# EAGLE board TSOC_GROVEY_FOUR (EAGLE 6.6.0)
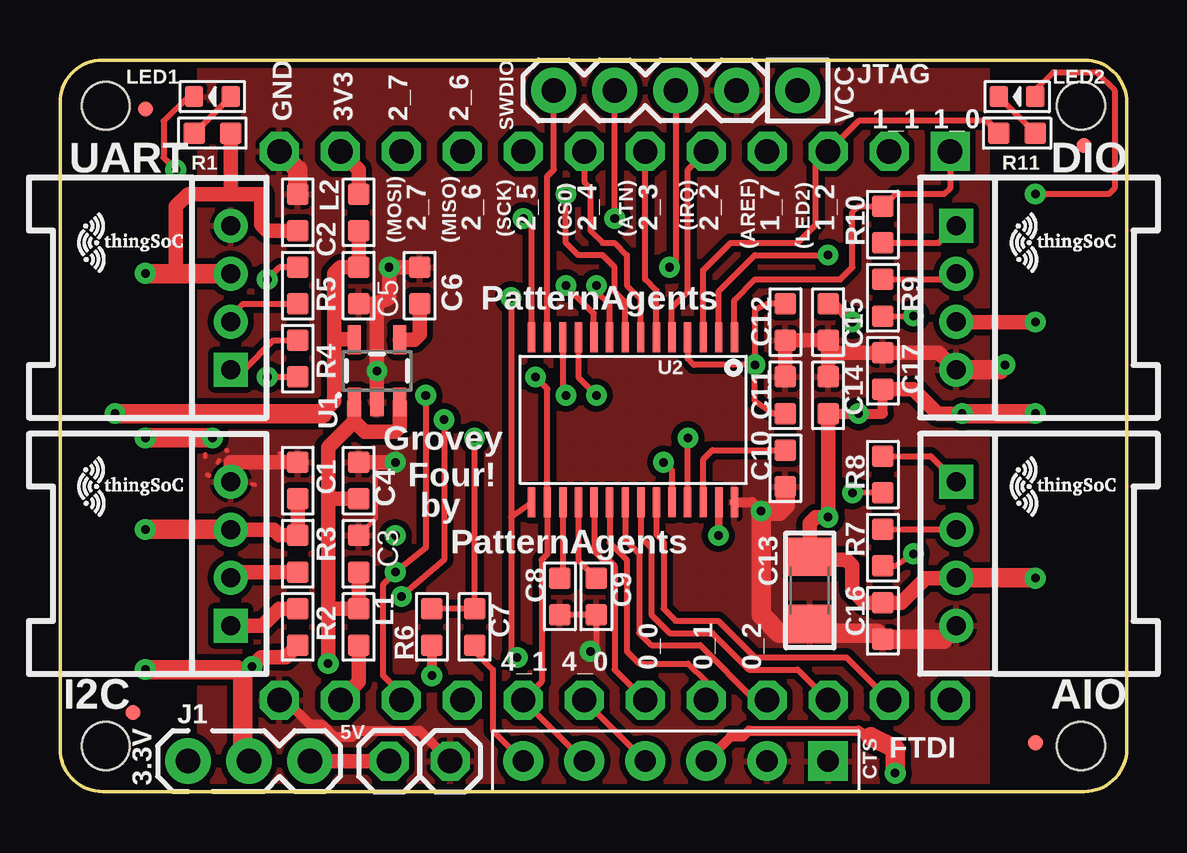
[diagram p0: board, top side]
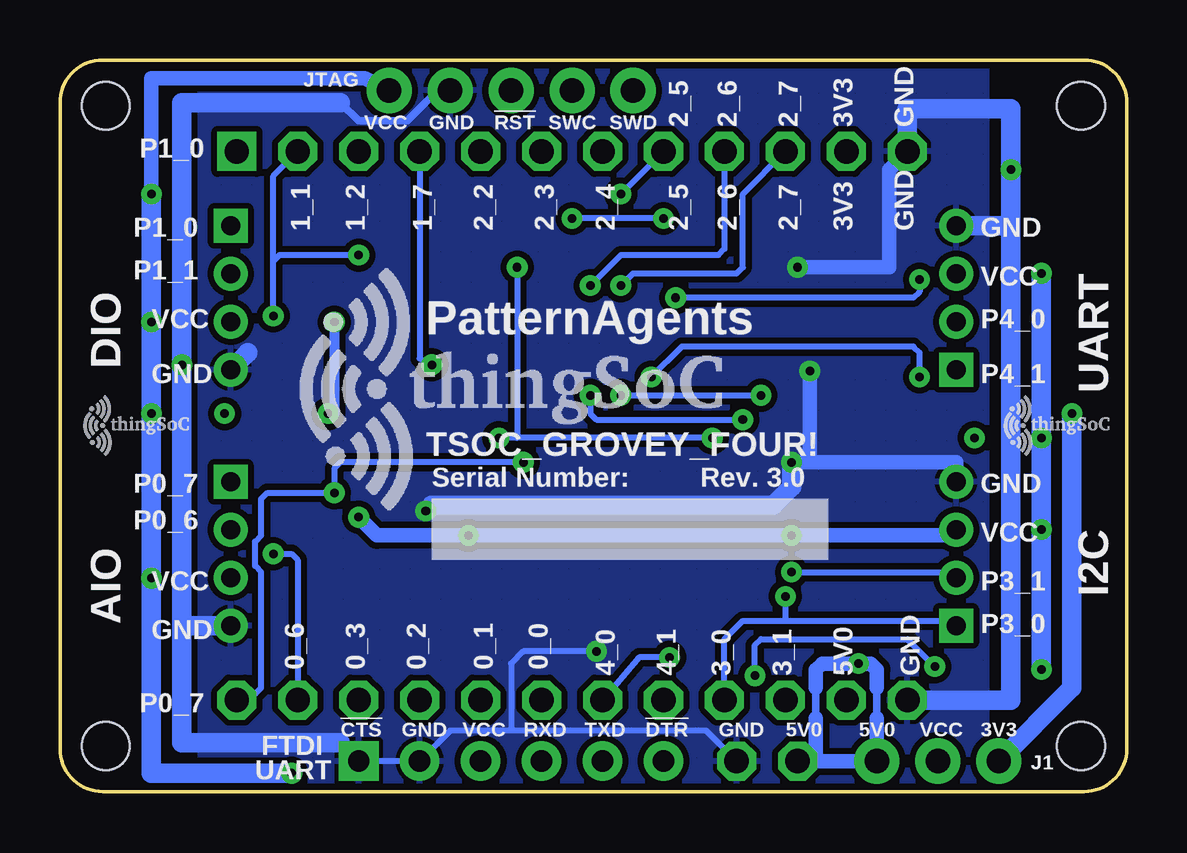
[diagram p1: board, bottom side, seen from below]

Size 44.45 x 30.48 mm. Coordinates in mm from the lower left corner, seen from the top.
Copper layers (1*16): Top 0.035mm / dielectric 1.5mm / Bottom 0.035mm
Design rules "PatternAgents_7mil": minimum track width 7mil, minimum drill 14mil, track to track 7mil, track to pad 7mil, pad to pad 7mil, via to via 7mil, smd to smd 7mil, copper to edge 7mil, drill to drill 7mil, minimum pad ring 12mil, minimum via ring 10mil, stop-mask expansion 4mil, vias tented up to drill 25mil, thermal gap 7mil

## Footprints (pad centres in the part's own frame; a part is rotated, then mirrored left to right if it is on the bottom)
1X01 = drill 1.016 octagon: 1 0,0
TSOC-BB-BRD-DIM = hole 2: 13.335,16.891; -13.335,16.891; 13.335,-23.749; -13.335,-23.749
HW4-2.0-90D = drill 0.8 pad 1.27 square: 1 -3,0 | drill 0.8 pad 1.27: 2 -1,0; 3 1,0; 4 3,0
C0603 = smd 0.889 x 0.889: 1 0,0.762; 2 0,-0.762
EIA-1206 = smd 1.6 x 1.8: 1 -1.4,0; 2 1.4,0
MICRO-FIDUCIAL = smd 0.635 x 0.635: 1 0,0
H6-2.54 = drill 0.889 pad 1.651 square: 1 0,6.35 | drill 0.889 pad 1.651: 2 0,3.81; 3 0,1.27; 4 0,-1.27; 5 0,-3.81; 6 0,-6.35
JMP-3-NO-PTH-2.54 = drill 1.016 pad 1.88: 1 0,0; 2 2.54,0; 3 5.08,0
PSOC_JTAG_MINSILK = drill 1.016 pad 1.88: 1 -5.08,0; 2 -2.54,0; 3 0,0; 4 2.54,0; 5 5.08,0
L0603 = smd 0.889 x 0.889: 1 -0.762,0; 2 0.762,0
LED-0603 = smd 0.762 x 0.889: + -0.762,0; - 0.762,0
R0603 = smd 0.889 x 0.889: 1 0,0.762; 2 0,-0.762
TSOC-BB-S24 = drill 1.016 square: 1B -11.43,11.43 | drill 1.016 octagon: 1C 11.43,11.43; 2B -11.43,8.89; 2C 11.43,8.89; 3B -11.43,6.35; 3C 11.43,6.35; 4B -11.43,3.81; 4C 11.43,3.81; 5B -11.43,1.27; 5C 11.43,1.27; 6B -11.43,-1.27; 6C 11.43,-1.27; 7B -11.43,-3.81; 7C 11.43,-3.81; 8B -11.43,-6.35; 8C 11.43,-6.35; 9B -11.43,-8.89; 9C 11.43,-8.89; 10B -11.43,-11.43; 10C 11.43,-11.43; 11B -11.43,-13.97; 11C 11.43,-13.97; 12B -11.43,-16.51; 12C 11.43,-16.51
SOT23-5 = smd 0.55 x 1.2: 1 -0.95,-1.3; 2 0,-1.3; 3 0.95,-1.3; 4 0.95,1.3; 5 -0.95,1.3
SSOP28 = smd 0.305 x 1.245: 1 4.224,3.441; 2 3.574,3.441; 3 2.924,3.441; 4 2.274,3.441; 5 1.624,3.441; 6 0.974,3.441; 7 0.325,3.44; 8 -0.326,3.441; 9 -0.976,3.441; 10 -1.626,3.441; 11 -2.276,3.441; 12 -2.926,3.441; 13 -3.576,3.441; 14 -4.226,3.441; 15 -4.224,-3.441; 16 -3.574,-3.441; 17 -2.924,-3.441; 18 -2.274,-3.441; 19 -1.624,-3.441; 20 -0.974,-3.441; 21 -0.324,-3.441; 22 0.326,-3.441; 23 0.976,-3.441; 24 1.626,-3.441; 25 2.276,-3.441; 26 2.926,-3.441; 27 3.576,-3.441; 28 4.226,-3.441

## Placement (x,y rotation side)
5V0  [1X01]  13.72,1.27 0 top
$$U$1  TSOC-PCB-SINGLE  [TSOC-BB-BRD-DIM]  25.65,15.24 270 top
$$U$2  TSOC-LOGO-SMALL  [TSOC-LOGO-SML]  40.39,12.7 0 top
$$U$3  TSOC-LOGO-SMALL  [TSOC-LOGO-SML]  40.39,22.86 0 top
AIO  4P-2.0-90D  [HW4-2.0-90D]  37.34,9.91 270 top
C1  100nf  [C0603]  9.91,12.95 180 top
C2  100nf  [C0603]  9.91,24.13 180 top
C3  10uf  [C0603]  12.45,9.91 0 top
C4  100nf  [C0603]  12.45,12.95 180 top
C5  10uf  [C0603]  12.45,21.08 180 top
C6  470Pf  [C0603]  14.99,21.08 180 top
C7  100nf  [C0603]  17.27,6.86 180 top
C8  2.2nf  [C0603]  20.83,8.13 180 top
C9  10nf  [C0603]  22.35,8.13 180 top
C10  1uF  [C0603]  30.23,13.46 180 top
C11  100nf  [C0603]  30.23,16.51 0 top
C12  1uF  [C0603]  30.23,19.56 180 top
C13  22uF  [EIA-1206]  31.24,8.38 270 top
C14  1uF  [C0603]  32,16.51 0 top
C15  100nf  [C0603]  32,19.56 180 top
C16  100nf  [C0603]  34.29,7.11 0 top
C17  100nf  [C0603]  34.29,17.53 180 top
DIO  4P-2.0-90D  [HW4-2.0-90D]  37.34,20.57 270 top
FID1  FIDUCIALUFIDUCIAL  [MICRO-FIDUCIAL]  3.05,3.3 0 top
FID2  FIDUCIALUFIDUCIAL  [MICRO-FIDUCIAL]  3.56,28.45 0 top
FID3  FIDUCIALUFIDUCIAL  [MICRO-FIDUCIAL]  40.64,2.03 0 top
FID4  FIDUCIALUFIDUCIAL  [MICRO-FIDUCIAL]  42.67,26.92 0 top
FTDI  6p-2.54  [H6-2.54]  25.65,1.27 270 top
GND  [1X01]  16.26,1.27 0 top
I2C  4P-2.0-90D  [HW4-2.0-90D]  7.11,9.91 90 top
J1  NO  [JMP-3-NO-PTH-2.54]  5.33,1.27 0 top
JTAG  JTAG-ISSPMIN  [PSOC_JTAG_MINSILK]  25.65,29.21 180 top
L1  120OHM-500MA  [L0603]  12.45,6.86 270 top
L2  120OHM-500MA  [L0603]  12.45,24.13 90 top
LED1  GREEN-0603  [LED-0603]  6.35,28.96 180 top
LED2  RED-0603  [LED-0603]  39.88,28.96 180 top
R1  1K 1/10W  [R0603]  6.35,27.43 90 top
R2  2.2K  [R0603]  9.91,6.86 0 top
R3  2.2K  [R0603]  9.91,9.91 180 top
R4  1K  [R0603]  9.91,18.03 180 top
R5  1K  [R0603]  9.91,21.08 0 top
R6  10K 1/10W  [R0603]  15.49,6.86 0 top
R7  1K  [R0603]  34.29,10.16 180 top
R8  1K  [R0603]  34.29,13.21 180 top
R9  1K  [R0603]  34.29,20.57 180 top
R10  1K  [R0603]  34.29,23.62 0 top
R11  1K 1/10W  [R0603]  39.88,27.43 270 top
TSOC  TSOC-24-BB  [TSOC-BB-S24]  25.65,15.24 270 top
U1  MIC5219 3.3V  [SOT23-5]  13.21,17.53 0 top
U2  CY8C4XXX-28  [SSOP28]  23.88,15.49 0 top
U$1  TSOC-LOGO-SMALL  [TSOC-LOGO-SML]  1.52,12.7 0 top
U$3  TSOC-LOGO-SMALL  [TSOC-LOGO-SML]  1.52,22.86 0 top
U$4  TSOC-LOGO  [TSOC-LOGO-BLANK]  0,0 0 top
U$100  TSOC-LOGO-SMALL  [TSOC-LOGO-SML]  4.32,15.24 0 bottom
U$102  TSOC-LOGO-LRG  [TSOC-LOGO-LRG]  31.24,16.76 0 bottom
U$103  TSOC-LOGO-SMALL  [TSOC-LOGO-SML]  42.67,15.24 0 bottom
UART  4P-2.0-90D  [HW4-2.0-90D]  7.11,20.57 90 top

## Library data of the parts
5V0 GND J1 = PatternAgents-ProtoPads
$$U$1-$$U$3 TSOC U$1 U$3 U$4 U$100 U$102 U$103 = thingSoC
AIO DIO I2C UART = Seeed-Connector -2016
C1 C2 C4 C6 C7 C10-C12 C14-C17 = Seeed-Capacitor-2016; MPN: CC0603KRX7R9BB104
C3 C5 = Seeed-Capacitor-2016; MPN: CC0603KRX5R6BB106
C8 = Seeed-Capacitor-2016; MPN: GRM1885C1H102JA01D
C9 = Seeed-Capacitor-2016; MPN: CC0603KRX7R9BB103
C13 = TSOC_USBUART2
FID1-FID4 = TSOC-ESP8266-BASE
FTDI = Seeed-Connector -2016; MPN: P125-1106A1BS116A1
JTAG U2 = PatternAgents-Cypress
L1 L2 = Seeed-Inductor-2016; MPN: BLM18AG121SN1D
LED1 LED2 = Seeed-LED-2016; MPN: 19-217-G7C-AN1P2-3T
R1 R11 = Seeed-Resistor-2016; MPN: RC0603JR-071KL
R2 R3 = Seeed-Resistor-2016; MPN: RC0603JR-072K2L
R4 R5 R7-R10 = Seeed-Resistor-2016; MPN: RC0603JR-072K2L; VALUE: 2.2K
R6 = Seeed-Resistor-2016; MPN: RC0603JR-0710KL
U1 = TSOC-ESP8266-BASE; PROD_ID: VREG-09872

## Nets
3V3: C5.2 J1.1 L2.1 U1.5
5V0: 5V0.1 C3.2 C4.1 J1.3 L1.1 U1.1 U1.3
!URST: C7.1 FTDI.6
!XRES: C7.2 JTAG.3 R6.1 U2.25
BYPASS1: C6.1 U1.4
GND: AIO.4 C1.2 C2.2 C3.1 C4.2 C5.1 C6.2 C8.1 C9.1 C10.1 C11.1 C12.1 C13.2 C14.1 C15.1 C16.2 C17.2 DIO.4 FTDI.1 FTDI.2 GND.1 I2C.4 JTAG.2 LED1.- TSOC.12B TSOC.12C U1.2 U2.28 UART.4
LEDR: LED2.- R11.1
N$17: LED1.+ R1.1
P0_0: TSOC.6C U2.19
P0_1: TSOC.5C U2.20
P0_2: TSOC.4C U2.21
P0_3: TSOC.3C U2.22
P0_6: R7.1 TSOC.2C U2.23
P0_6E: AIO.2 R7.2
P0_7: R8.1 TSOC.1C U2.24
P0_7E: AIO.1 R8.2
P1_0: R10.1 TSOC.1B U2.1
P1_0E: DIO.1 R10.2
P1_1: R9.1 TSOC.2B U2.2
P1_1E: DIO.2 R9.2
P1_2: R11.2 TSOC.3B U2.3
P1_7: C11.2 C12.2 TSOC.4B U2.4
P2_2: TSOC.5B U2.5
P2_3: TSOC.6B U2.6
P2_4: TSOC.7B U2.7
P2_5: TSOC.8B U2.8
P2_6: TSOC.9B U2.9
P2_7: TSOC.10B U2.10
P3_0: I2C.1 R2.1 TSOC.9C U2.11
P3_1: I2C.2 R3.1 TSOC.10C U2.12
P3_2: JTAG.5 U2.13
P3_3: JTAG.4 U2.14
P4_0: FTDI.4 R5.1 TSOC.7C U2.15
P4_0E: R5.2 UART.2
P4_1: FTDI.5 R4.1 TSOC.8C U2.16
P4_1E: R4.2 UART.1
P4_2: C8.2 U2.17
P4_3: C9.2 U2.18
TSOC_3V3: L2.2 TSOC.11B
TSOC_5V0: L1.2 TSOC.11C
VCC: AIO.3 C1.1 C2.1 C13.1 C14.2 C15.2 C16.1 C17.1 DIO.3 FTDI.3 I2C.3 J1.2 JTAG.1 LED2.+ R1.2 R2.2 R3.2 R6.2 U2.27 UART.3
VCCD: C10.2 U2.26

## Tracks (layer width: path | path; a pad name or v marks a point on that pad's centre or on a via)
3V3  (via drill 0.36)
  Top 0.178: 12.09,18.85 U1.5
  Top 0.61: L2.1 C5.2 11.68,21.84 11.43,21.59 11.43,18.85 | 11.43,18.85 11.43,16.26 10.92,15.75 | 12.09,18.85 11.43,18.85
  Top 0.813: 10.92,15.75 v2.29,15.75
  Bottom 0.813: v2.29,15.75 2.29,4.32 J1.1
5V0  (via drill 0.36)
  Top 0.61: C3.2 L1.1 11.18,7.62 | U1.3 14.16,15.17 13.97,14.99 12.7,14.99 12.26,15.43 | U1.1 12.26,15.43 | 11.18,12.19 11.18,14.35 12.26,15.43 | 11.18,12.19 11.18,7.62 | 11.18,7.62 v11.18,5.33 | C4.1 11.18,12.19 | 5V0.1 J1.3
  Bottom 0.305: 10.41,3.05 10.41,4.32 | 12.95,4.32 12.95,3.05
  Bottom 0.61: 12.95,4.32 12.95,5.08 12.7,5.33 v11.18,5.33 10.67,5.33 10.41,5.08 10.41,4.32 | 10.41,3.05 J1.3 | 12.95,1.27 J1.3 | 12.95,3.05 12.95,1.27 | 12.95,1.27 5V0.1 J1.3
!URST
  Top 0.254: C7.1 17.27,5.84 18.03,5.08 18.03,2.54 FTDI.6
!XRES  (via drill 0.36)
  Top 0.254: R6.1 C7.2 v17.27,14.73 | U2.25 26.15,13.22 v26.16,14.73 | JTAG.3 25.65,22.1 v25.4,21.84
  Bottom 0.254: v17.27,14.73 25.4,14.73 | 25.4,14.73 v26.16,14.73 | v25.4,21.84 25.4,14.73
BYPASS1
  Top 0.61: U1.4 14.76,18.83 14.99,19.05 C6.1
GND  (via drill 0.36)
  Top 0.178: C4.2 12.45,13.87 12.54,13.81 | 12.8,13.69 C4.2 | 12.62,13.69 C4.2 | C4.2 12.8,13.87 12.8,13.81 | C4.2 12.45,13.69 12.54,13.62 | C3.1 13.16,11.38 13.16,13.72 | 9.78,13.69 C1.2 | 9.25,14.05 9.16,14.1 | I2C.4 6.93,12.98 7.04,12.98 | 9.6,13.69 C1.2 | 6.58,13.69 6.63,13.8 | 9.25,13.51 9.25,13.62 | C1.2 9.6,13.51 9.6,13.62 | 6.22,13.16 6.14,13.2 | 6.04,14.05 6.04,13.95 | 8,12.8 8.12,12.78 | 6.93,14.22 6.96,14.2
  Top 0.254: LED1.- 5.33,28.96 4.32,27.94 4.32,26.42 v4.83,25.91 | v22.1,5.84 22.35,6.1 C9.1 C8.1
  Top 0.406: TSOC.12C 9.4,3.81 10.41,2.79 10.92,2.79 11.43,2.29 12.19,2.29 12.45,2.54 14.99,2.54 GND.1 | U2.28 28.84,12.05 v29.21,11.68
  Top 0.61: C1.2 7.11,13.72 I2C.4 | C4.2 13.16,13.72 v13.97,13.72 | DIO.4 36.62,18.29 C17.2 32,18.29 | 31.24,6.6 C13.2 31.11,7.11 | C6.2 v13.72,21.84 13.72,20.57 13.21,20.32 | C5.1 13.21,20.32 | C14.1 32,18.29 | 32,18.29 C15.1 C12.1 C11.1 | U1.2 v13.21,17.53 13.21,20.32
  Top 0.813: C2.2 9.91,25.91 TSOC.12B | DIO.4 39.16,17.57 v39.37,17.78 | C10.1 30.23,11.94 29.97,11.68 v29.21,11.68 29.21,7.37 29.97,6.6 31.24,6.6 | C13.2 31.62,6.6 34.04,6.6 C16.2 36.83,6.35 37.34,6.86 AIO.4
  Bottom 0.254: 25.65,2.54 17.53,2.54 GND.1 | 25.65,2.54 28.19,2.54 FTDI.2 FTDI.1 | v22.1,5.84 25.15,5.84 25.65,5.33 25.65,2.54
  Bottom 0.305: 32.77,28.7 32,27.94 29.97,27.94 28.7,29.21 JTAG.2
  Bottom 0.61: I2C.4 7.11,13.72 13.46,13.72 | v13.72,21.84 9.91,21.84 9.91,25.91 TSOC.12B | 32.77,2.03 FTDI.1 | v13.21,17.53 13.21,13.97
  Bottom 0.813: TSOC.12B 9.14,28.45 4.83,28.45 v4.83,25.91 4.83,23.37 | 39.37,6.86 v39.37,17.78 39.37,28.7 32.77,28.7 | 39.37,6.86 39.37,2.03 32.77,2.03 | 4.83,23.37 4.83,3.81 TSOC.12C | UART.4 5.03,23.57 4.83,23.37 | 36.62,18.29 DIO.4 | AIO.4 39.32,6.91 39.37,6.86 | v13.97,13.72 13.97,12.7 14.73,11.94 28.96,11.94 v29.21,11.68
  pour Bottom (isolate 0.254, rank 2, hatched): 5.84,0 5.84,30.48 38.61,30.48 38.61,0
  pour Top (isolate 0.254, hatched): 5.84,0 5.84,30.48 38.61,30.48 38.61,0
LEDR
  Top 0.254: LED2.- R11.1
N$17
  Top 0.254: R1.1 LED1.+
P0_0
  Top 0.254: U2.19 22.25,10.01 22.61,9.65 22.86,9.65 23.11,9.4 23.11,5.08 TSOC.6C
P0_1
  Top 0.254: U2.20 22.9,10.37 23.62,9.65 23.62,5.84 24.13,5.33 26.16,5.33 26.92,4.57 TSOC.5C
P0_2
  Top 0.254: U2.21 23.55,10.48 24.13,9.91 24.13,6.6 24.64,6.1 26.67,6.1 28.96,3.81 TSOC.4C
P0_3
  Top 0.254: U2.22 24.2,10.6 24.64,10.16 24.64,7.37 25.4,6.6 27.18,6.6 28.7,5.08 30.73,5.08 TSOC.3C
P0_6  (via drill 0.36)
  Top 0.254: U2.23 24.85,10.71 25.15,10.41 25.15,7.62 25.65,7.11 27.43,7.11 28.96,5.59 32.77,5.59 TSOC.2C | R7.1 34.8,9.4 v35.56,9.91
  Bottom 0.254: v35.56,9.91 34.8,9.91 34.54,9.65 TSOC.2C
P0_6E
  Top 0.254: R7.2 37.32,10.92 AIO.2
P0_7  (via drill 0.36)
  Top 0.254: R8.1 v33.02,12.45 | 25.4,13.46 v25.15,13.72 25.5,13.36 U2.24
  Bottom 0.254: TSOC.1C 36.58,3.81 36.07,4.32 36.07,9.14 36.32,9.4 36.32,10.41 36.07,10.67 36.07,12.19 35.81,12.45 v33.02,12.45 33.02,13.46 32.77,13.72 v25.15,13.72
P0_7E
  Top 0.254: R8.2 36.27,13.97 AIO.1
P1_0
  Top 0.254: TSOC.1B 37.08,25.15 36.83,24.89 34.8,24.89 R10.1 33.27,24.38 33.02,24.13 33.02,21.84 32.51,21.34 28.96,21.34 28.1,20.48 U2.1
P1_0E
  Top 0.254: R10.2 36.62,22.86 DIO.1
P1_1  (via drill 0.36)
  Top 0.254: R9.1 v35.56,19.81 | U2.2 27.45,20.85 28.96,22.35 v32,22.35
  Bottom 0.254: v35.56,19.81 35.56,22.1 | 35.56,22.1 35.56,25.65 TSOC.2B | v32,22.35 35.31,22.35 35.56,22.1
P1_1E
  Top 0.254: R9.2 37.1,21.34 DIO.2
P1_2
  Top 0.254: 38.61,27.94 33.27,27.94 TSOC.3B 31.5,26.16 31.5,23.62 30.73,22.86 27.94,22.86 26.8,21.72 U2.3
  Top 0.305: 38.61,27.94 R11.2
P1_7  (via drill 0.36)
  Top 0.254: v28.96,17.78 26.42,17.78 26.15,18.05 U2.4 | C11.2 29.72,15.75 28.96,16.26 v28.96,17.78 | C12.2 29.46,20.32 28.96,20.07 v28.96,17.78
  Bottom 0.254: TSOC.4B 29.46,18.03 v28.96,17.78
P2_2
  Top 0.254: U2.5 25.5,20.17 26.16,20.83 26.16,25.91 TSOC.5B
P2_3
  Top 0.254: U2.6 24.85,20.87 24.38,21.34 TSOC.6B
P2_4
  Top 0.254: TSOC.7B 21.84,25.4 22.1,25.15 22.1,23.37 22.61,22.86 23.11,22.86 23.62,22.35 23.62,21.08 24.2,20.5 U2.7
P2_5  (via drill 0.36)
  Top 0.254: U2.8 23.55,20.39 23.11,20.83 23.11,21.84 22.61,22.35 21.59,22.35 21.08,22.86 v21.08,24.89
  Bottom 0.254: TSOC.8B v21.08,24.89
P2_6  (via drill 0.36)
  Top 0.254: v22.35,21.08 22.35,20.83 22.9,20.28 U2.9
  Bottom 0.254: TSOC.9B 16.76,22.61 17.02,22.35 21.08,22.35 v22.35,21.08
P2_7  (via drill 0.36)
  Top 0.254: U2.10 22.25,19.91 v21.08,21.08
  Bottom 0.254: v21.08,21.08 20.57,21.59 16.26,21.59 16,21.84 16,24.89 TSOC.10B
P3_0  (via drill 0.36)
  Top 0.254: U2.11 21.6,17.26 v22.35,16.51 | v16,15.49 16,9.65 v14.22,8.13
  Top 0.61: I2C.1 8.43,6.91 9.14,7.62 R2.1
  Bottom 0.178: 7.11,6.93 I2C.1
  Bottom 0.254: TSOC.9C 16.76,6.35 16,7.11 14.22,7.11 | 14.22,7.11 7.32,7.11 I2C.1 | v22.35,16.51 22.35,15.75 22.1,15.49 v16,15.49 | v14.22,8.13 14.22,7.11
P3_1  (via drill 0.36)
  Top 0.254: TSOC.10C 14.22,4.06 13.46,4.83 13.46,8.64 v13.97,9.14 15.24,10.16 v15.24,16.51 | U2.12 20.95,16.64 v21.08,16.51
  Top 0.61: R3.1 7.35,9.14 I2C.2
  Bottom 0.254: v13.97,9.14 7.35,9.14 I2C.2 | v21.08,16.51 v15.24,16.51
P3_2
  Top 0.254: U2.13 20.3,25.63 20.57,25.91 JTAG.5
P3_3  (via drill 0.36)
  Top 0.254: U2.14 19.65,23.78 v19.3,23.88 | v23.11,23.88 JTAG.4
  Bottom 0.254: v19.3,23.88 v23.11,23.88
P4_0  (via drill 0.36)
  Top 0.254: R5.1 9.14,21.84 v8.64,21.34 | v18.8,20.57 18.8,11.43 | U2.15 19.65,12.03 18.8,11.43 | 18.8,11.43 18.8,5.84 v19.05,5.59 | TSOC.7C FTDI.4
  Bottom 0.254: v19.05,5.59 20.32,5.59 TSOC.7C | v8.64,21.34 8.64,20.83 8.89,20.57 v18.8,20.57
P4_0E
  Top 0.254: UART.2 7.11,19.81 7.62,20.32 R5.2
P4_1  (via drill 0.36)
  Top 0.254: v19.81,17.27 20.3,16.78 U2.16 20.3,9.89 20.07,9.65 20.07,4.57 TSOC.8C FTDI.5 | v8.64,17.27 R4.1
  Bottom 0.254: v8.64,17.27 8.64,18.29 8.89,18.54 18.54,18.54 v19.81,17.27
P4_1E
  Top 0.254: UART.1 7.67,17.57 8.89,18.8 R4.2
P4_2
  Top 0.254: U2.17 20.95,9.01 C8.2
P4_3
  Top 0.254: U2.18 21.6,9.64 C9.2
TSOC_3V3
  Top 0.61: L2.2 12.45,25.91 TSOC.11B
TSOC_5V0
  Top 0.61: L1.2 12.45,4.57 TSOC.11C
VCC  (via drill 0.36)
  Top 0.178: 6.93,10.92 6.93,11.02 I2C.3
  Top 0.254: LED2.+ 40.64,29.21 41.4,29.97 43.18,29.97 43.94,29.21 43.94,25.15 43.69,24.89 v40.64,24.89 | v8,5.21 7.75,5.21 7.49,4.95
  Top 0.305: U2.27 27.45,10.69 v27.43,10.67
  Top 0.406: 33.78,2.29 33.27,2.54 28.7,2.54 28.45,2.29 27.94,2.29 FTDI.3 | C15.2 32.26,20.32 v33.02,19.56 | C14.2 v33.27,15.75 34.29,15.75 C17.1 | R6.2 v15.49,4.83
  Top 0.61: C1.1 R3.2 9.14,10.67 8.91,10.91 I2C.3 | R2.2 9.4,5.59 8.38,5.59 v8,5.21 7.62,4.83 | C17.1 35.56,16.76 36.58,15.75 v37.59,15.75 | C2.1 8.64,23.37 8.38,23.62 8.38,24.89 7.11,24.89 | 7.11,24.89 5.33,24.89 4.83,24.38 4.83,21.57 | R1.2 7.11,24.89 | AIO.3 37.32,8.89 36.07,8.89 35.05,7.87 C16.1 33.53,7.87 33.02,8.38 33.02,9.4 32.77,9.65 31.37,9.65 C13.1 31.24,11.18 31.5,11.43 v32,11.43 C14.2 | v40.64,19.56 37.35,19.56 DIO.3
  Top 0.813: UART.3 4.83,21.57 3.57,21.57 v3.56,21.59 | v3.56,5.08 7.37,5.08 7.49,4.95 7.62,4.83 7.62,1.52 J1.2 | v6.35,14.73 v3.56,14.73 | v3.56,10.92 6.93,10.92 7.1,10.92 | v37.59,15.75 v40.64,15.75 | v34.8,0.76 34.8,1.78 33.78,2.29 | AIO.3 40.62,8.91 v40.64,8.89
  Bottom 0.178: 40.66,8.53 40.72,8.53 v40.64,8.89
  Bottom 0.254: v15.49,4.83 R6.2 15.24,6.35 9.14,6.35 v8,5.21
  Bottom 0.406: v33.02,19.56 33.02,15.75 v33.27,15.75
  Bottom 0.61: JTAG.1 31.75,29.72 40.64,29.72 v40.64,24.89 | v32,11.43 31.24,10.67 v27.43,10.67 v13.97,10.67 7.35,10.67 I2C.3
  Bottom 0.813: v3.56,21.59 v3.56,14.73 v3.56,10.92 v3.56,5.08 | v40.64,8.89 v40.64,15.75 v40.64,19.56 v40.64,24.89 | 40.66,8.91 40.66,8.53 40.66,1.03 40.64,1.02 40.64,0.76 v34.8,0.76
VCCD
  Top 0.254: U2.26 26.8,13.85 27.18,14.22 C10.2

## Text on the board
tPlace: SWDIO | VCC | GND | 3V3 | 2_7 | 2_6 | 1_1 | 1_0 | (MOSI) | 2_7 | (MISO) | 2_6 | (SCK) | 2_5 | (CS0) | 2_4 | (ATN) | 2_3 | (IRQ) | 2_2 | (AREF) | 1_7 | (LED2) | 1_2 | PatternAgents | Grovey | Four! | by | PatternAgents | 4_1 | 4_0 | 0_0 | 0_1 | 0_2 | 5V | !CTS | 3.3V
bPlace: JTAG | GND | 3V3 | 2_7 | 2_6 | 2_5 | SWD | SWC | !RST | GND | VCC | P1_0 | GND | GND | 3V3 | 2_7 | 2_6 | 2_5 | 2_4 | 2_3 | 2_2 | 1_7 | 1_2 | 1_1 | P1_0 | UART | VCC | P1_1 | DIO | P4_0 | PatternAgents | VCC | P4_1 | GND | TSOC_GROVEY_FOUR! | Rev. 3.0 | Serial Number: | GND | P0_7 | I2C | P0_6 | VCC | AIO | P3_1 | VCC | P3_0 | GND | GND | 5V0 | 3_1 | 3_0 | 4_1 | 4_0 | 0_0 | 0_1 | 0_2 | 0_3 | 0_6 | P0_7 | J1 | 3V3 | VCC | 5V0 | 5V0 | GND | !DTR | TXD | RXD | VCC | GND | !CTS | FTDI | UART